# Altium PCB DSpico_PCB.PcbDoc (part 1 of 2)
Units mm, origin at the board's own origin, x right, y up, seen from the top; angles counter-clockwise.
Board outline 27.22 x 30.1 mm, 4 copper layers (L1, L2-GND, L3-PW, L4), stack 0.77 mm thick; 52 components, 45 nets, 173 pads, 142 vias.
Unrouted connection lines stored in the file: 1.
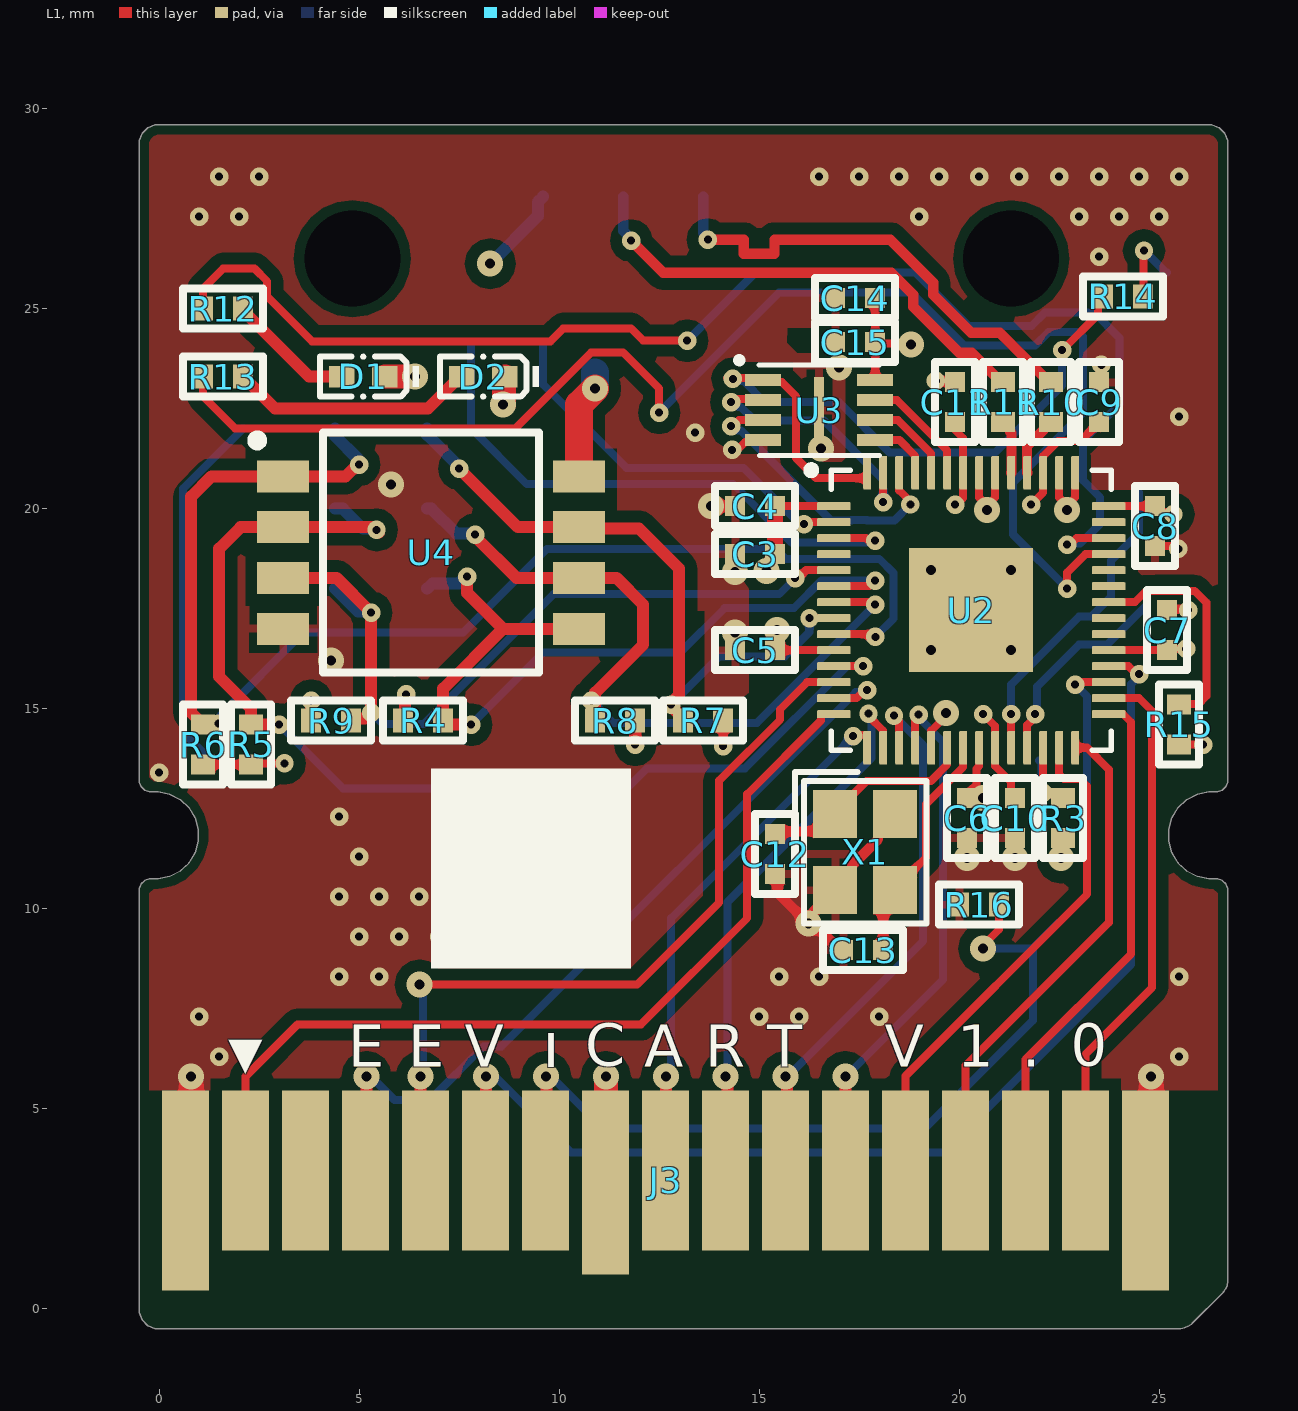
[diagram p0: L1 view]
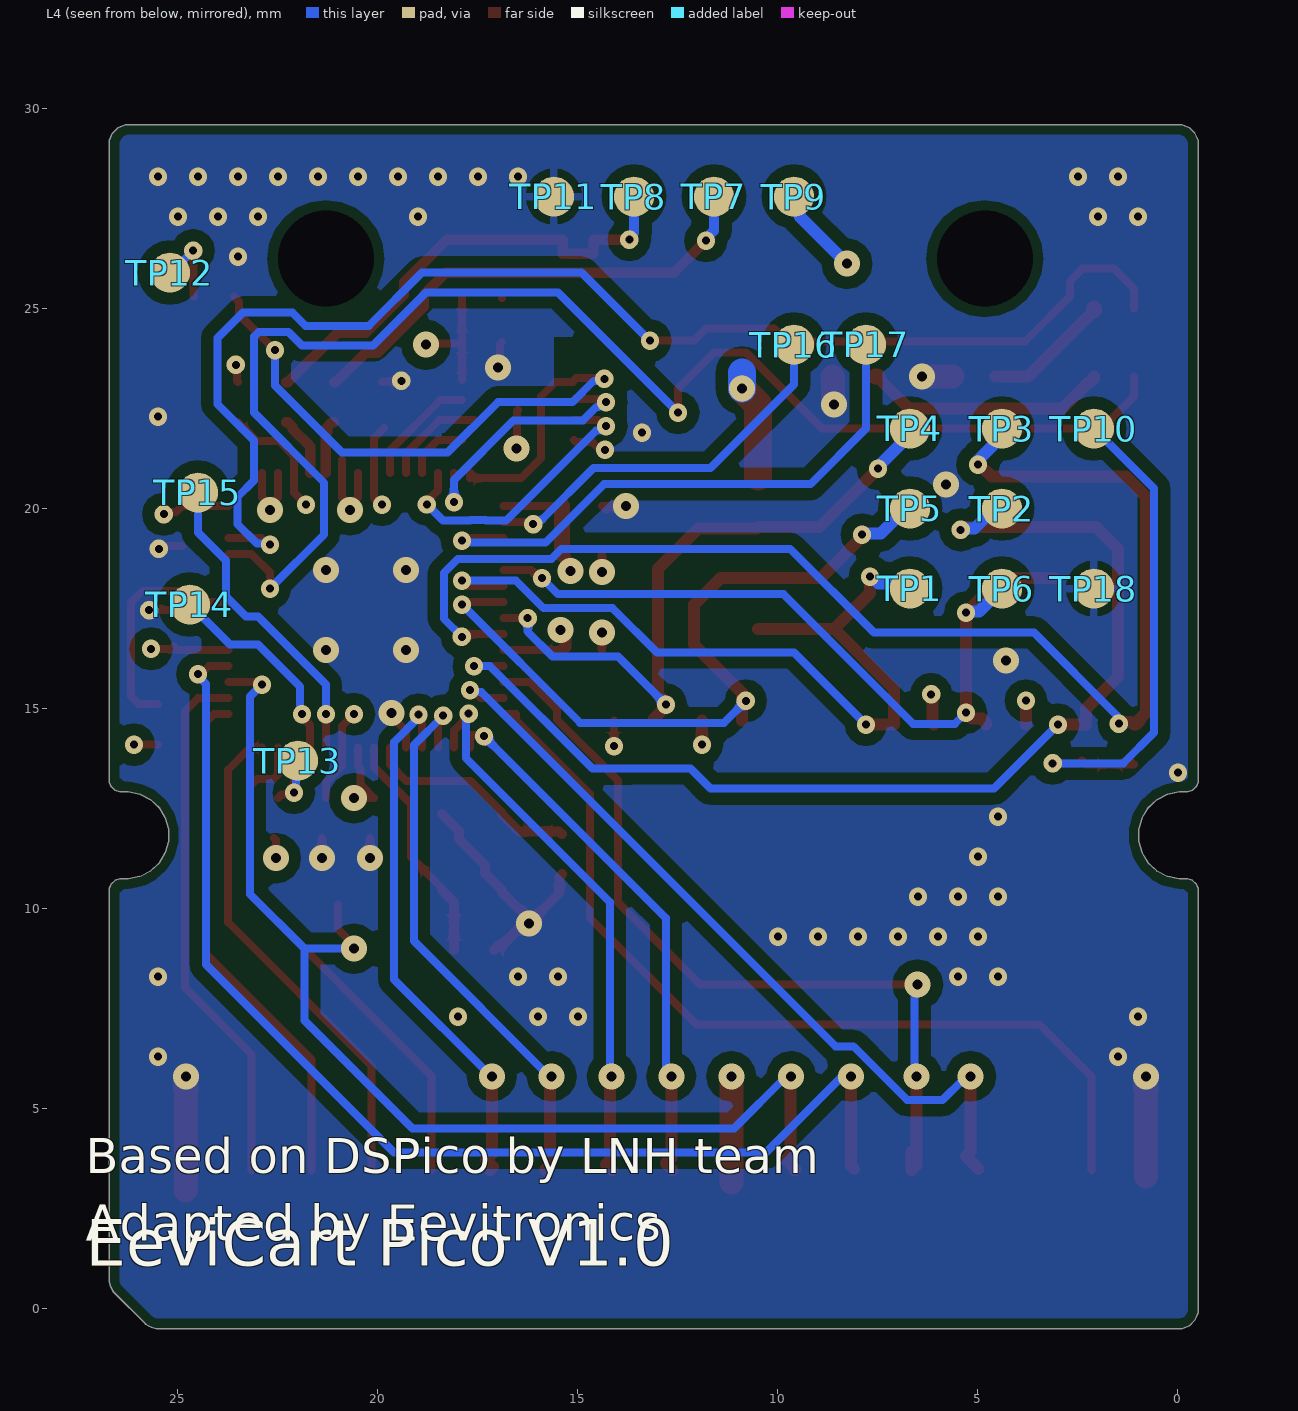
[diagram p1: L4 view, seen from below]
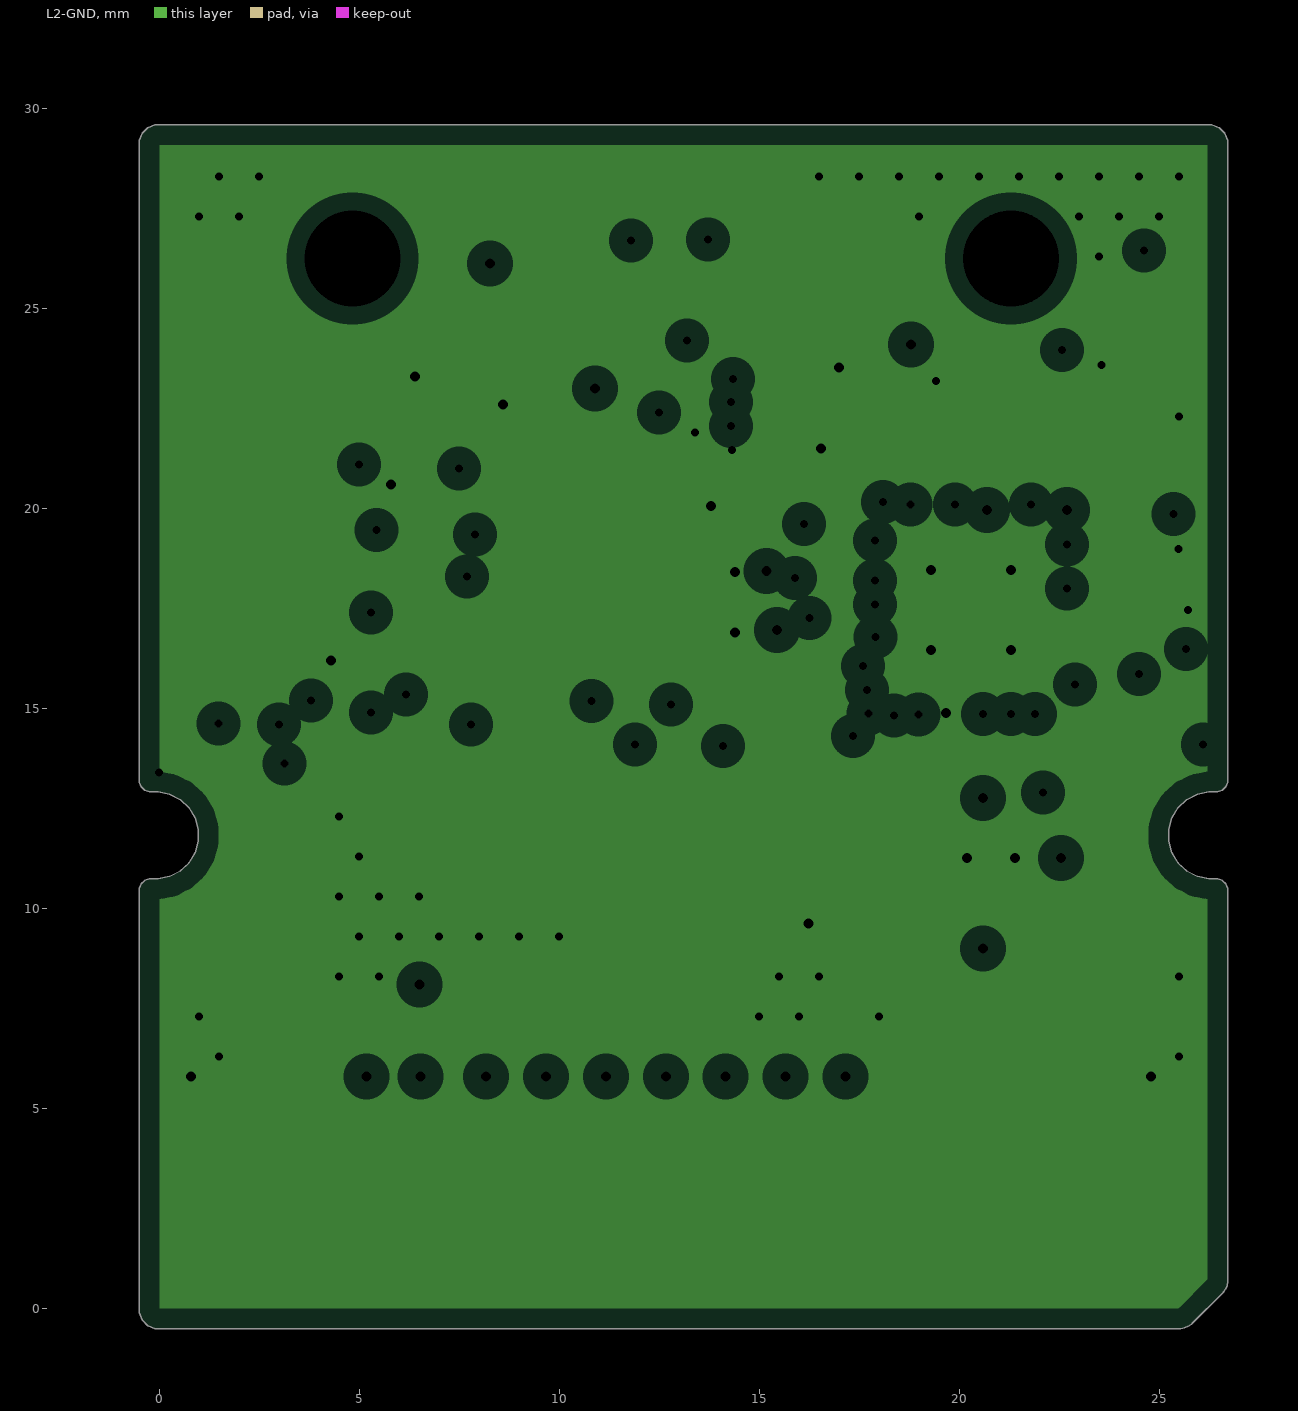
[diagram p2: L2-GND, clearances drawn from the general rule]
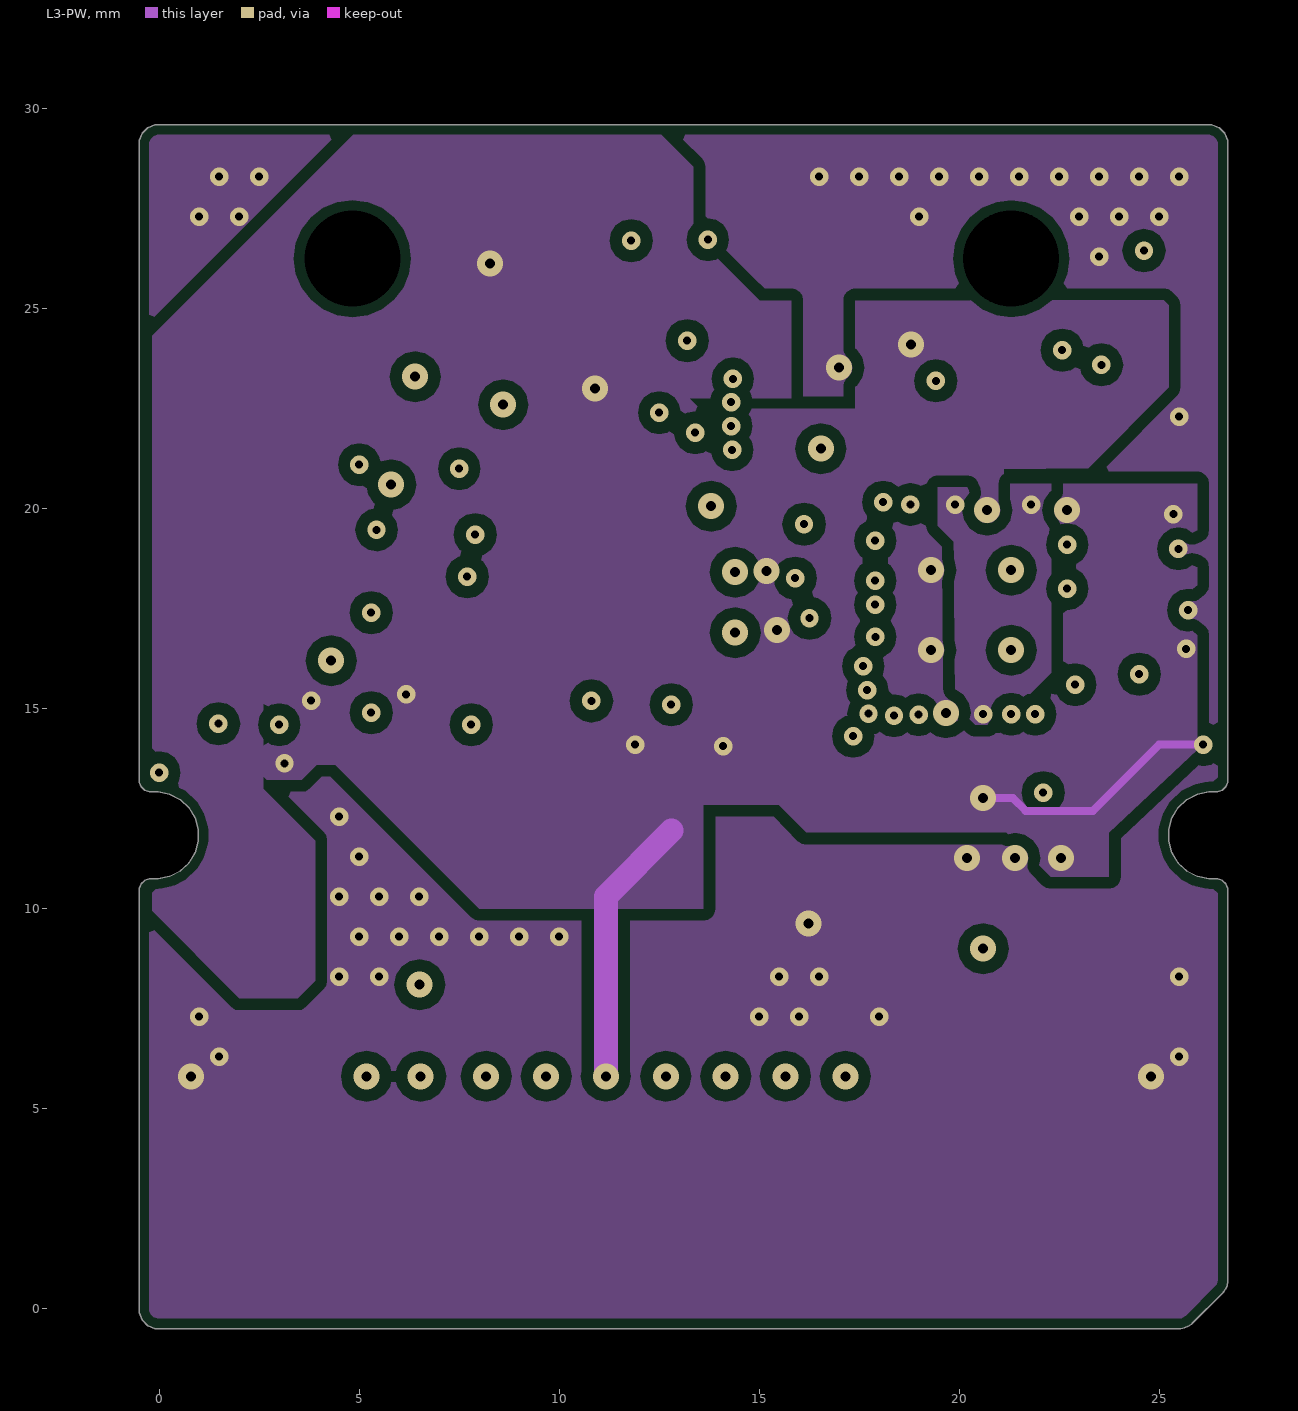
[diagram p3: L3-PW]
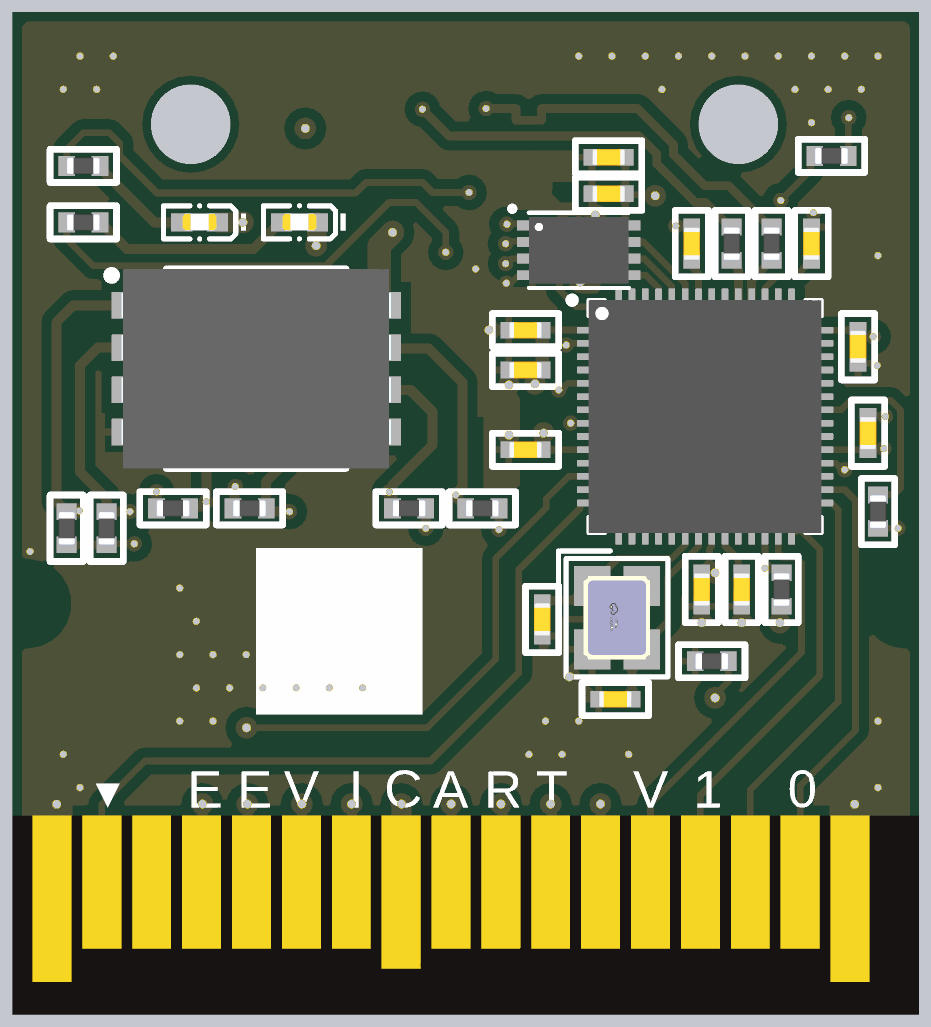
[diagram p4: 3D render of the assembled board from above, using the file's embedded part models]

## Layer stack, top to bottom
Top Solder: solder mask 0.01, Solder Resist, Dk 3.5
L1: signal copper 0.035
Dielectric 1: prepreg 0.21, PP-006, Dk 4.1
L2-GND: plane copper 0.015, net GND
Dielectric1: dielectric 0.25, FR-4, Dk 4.8
L3-PW: signal copper 0.015
Dielectric 2: prepreg 0.21, PP-006, Dk 4.1
L4: signal copper 0.035
Bottom Solder: solder mask 0.01, Solder Resist, Dk 3.5

## Board outline
-0.502,-0.101 -0.502,10.507 -0.452,10.621 -0.361,10.706 -0.243,10.748 -0.181,10.743 -0.032,10.743 0.26,10.803 0.525,10.94 0.743,11.143 0.898,11.398 0.978,11.684 0.978,11.982 0.898,12.269 0.743,12.523 0.525,12.727 0.26,12.863 -0.032,12.923 -0.181,12.923 -0.243,12.919 -0.361,12.96 -0.452,13.045 -0.502,13.16 -0.502,13.222 -0.502,29.199 -0.426,29.383 -0.285,29.524 -0.101,29.6 26.314,29.6 26.498,29.524 26.638,29.383 26.715,29.199 26.715,13.16 26.665,13.045 26.573,12.96 26.456,12.919 26.393,12.923 26.244,12.923 25.952,12.863 25.688,12.727 25.47,12.523 25.315,12.269 25.234,11.982 25.234,11.684 25.315,11.398 25.47,11.143 25.688,10.94 25.952,10.803 26.244,10.743 26.393,10.743 26.456,10.748 26.573,10.706 26.665,10.621 26.715,10.507 26.715,0.678 26.695,0.582 26.658,0.491 26.603,0.409 26.568,0.374 25.839,-0.355 25.804,-0.39 25.722,-0.445 25.631,-0.483 25.534,-0.502 25.485,-0.502 -0.002,-0.502 -0.101,-0.502 -0.285,-0.426 -0.426,-0.285

## Design rules (kind name [scope] priority, off if disabled: settings)
BoardOutlineClearance [All] p1: gap=0.25 ignorepadtopadclearanceinfootprint=FALSE except(0: Arc-SplitContinuation Track-SplitContinuation SMDPad-SplitContinuation THPad-SplitContinuation Via-SplitContinuation Fill-SplitContinuation Poly-SplitContinuation Region-SplitContinuation Text-SplitContinuation)
Clearance "Clearance poly Power Polygon" [OnLayer('L4-PWR') vs InPolygon] p1: gap=0.4 ignorepadtopadclearanceinfootprint=FALSE
Clearance Clearance-xPP-xTP-xTT [All] p2: gap=0.3 ignorepadtopadclearanceinfootprint=FALSE except(0.125: Arc-Arc Arc-Track Arc-SMDPad Arc-THPad Arc-Via Track-Track Track-SMDPad Track-THPad Track-Via SMDPad-SMDPad SMDPad-THPad SMDPad-Via THPad-THPad THPad-Via Via-Via; 0.15: Arc-Text Track-Text SMDPad-Text THPad-Text Via-Text Fill-Text Poly-Text Region-Text Text-Text; 0.25: Arc-Hole Track-Hole SMDPad-Hole THPad-Hole Via-Hole Fill-Hole Poly-Hole Region-Hole Text-Hole)
ComponentClearance [All] p1: gap=0 collisioncheckmode=3 verticalgap=0 showdistances=FALSE
DiffPairsRouting DiffPairsRouting_USB [All] p1: maxlimit=0.254 minlimit=0.1 mostfreqgap=0.127 toplayer_mingap=0.126 toplayer_minwidth=0.26 toplayer_maxwidth=0.861 toplayer_prefwidth=0.26 midlayer1_minwidth=0.143 midlayer1_maxwidth=0.499 midlayer1_prefwidth=0.143 bottomlayer_mingap=0.126 bottomlayer_minwidth=0.26 bottomlayer_maxwidth=0.861 bottomlayer_prefwidth=0.26 impedanceprofiledriven=TRUE impedanceprofileid={773E90AA-7B5E-4F0F-963B-D0F3BC933954} impedanceprofilevalue=90.000000 maxuncoupledlength=12.7
Height [All] p1: minheight=0 maxheight=25 prefheight=12.5
HoleSize HoleSize-PTH [All] p1: absolutevalues=TRUE maxlimit=4 minlimit=0.15 maxpercent=80.000 minpercent=20.000
HoleToHoleClearance [All] p1: gap=0.35 allowstackedmicrovias=TRUE
MatchedLengths MatchedLengths_USB_DiffPairs_1 [InxSignalClass('USB_CHJ1_1_DL') OR InxSignalClass('USB_CHJ1_1_RX') OR InxSignalClass('USB_CHJ1_1_TX')] p1: tolerance=0.127 checknetsindiffpair=TRUE checkdiffpairvsdiffpair=FALSE checkxsignals=FALSE checkothers=FALSE
MatchedLengths MatchedLengths_USB_DiffPairs [InxSignalClass('USB_CHJ1_1_DL') OR InxSignalClass('USB_CHJ1_1_RX') OR InxSignalClass('USB_CHJ1_1_TX')] p2: tolerance=0.127 checknetsindiffpair=TRUE checkdiffpairvsdiffpair=FALSE checkxsignals=FALSE checkothers=FALSE
MatchedLengths DiffPairClass [InDifferentialPairClass('All Differential Pairs')] p3: tolerance=0.127 checknetsindiffpair=TRUE checkdiffpairvsdiffpair=FALSE checkxsignals=FALSE checkothers=FALSE
MatchedLengths MatchedLengths_GBE0 [InNetClass('GBE0')] p4: tolerance=0.127 checknetsindiffpair=FALSE checkdiffpairvsdiffpair=TRUE checkxsignals=TRUE checkothers=TRUE
MatchedLengths MatchedLengths_GBE1 [InNetClass('GBE1')] p5: tolerance=0.127 checknetsindiffpair=FALSE checkdiffpairvsdiffpair=TRUE checkxsignals=TRUE checkothers=TRUE
MatchedLengths MatchedLengths_GBE2 [InNetClass('GBE2')] p6: tolerance=0.127 checknetsindiffpair=FALSE checkdiffpairvsdiffpair=TRUE checkxsignals=TRUE checkothers=TRUE
MatchedLengths MatchedLengths_HDMI [InNetClass('HDMI')] p7: tolerance=0.127 checknetsindiffpair=FALSE checkdiffpairvsdiffpair=TRUE checkxsignals=TRUE checkothers=TRUE
MatchedLengths MatchedLengths_USB-GBE [InNetClass('USB-GBE')] p8: tolerance=0.127 checknetsindiffpair=FALSE checkdiffpairvsdiffpair=TRUE checkxsignals=TRUE checkothers=TRUE
MatchedLengths MatchedLengths_USB3 [InNetClass('USB3')] p9: tolerance=0.127 checknetsindiffpair=FALSE checkdiffpairvsdiffpair=TRUE checkxsignals=TRUE checkothers=TRUE
MatchedLengths MatchedLengths_USB2 [InNetClass('USB2')] p10: tolerance=0.127 checknetsindiffpair=FALSE checkdiffpairvsdiffpair=TRUE checkxsignals=TRUE checkothers=TRUE
MatchedLengths MatchedLengths_DS [InNetClass('D[7..0]')] p11: tolerance=0.127 checknetsindiffpair=FALSE checkdiffpairvsdiffpair=TRUE checkxsignals=TRUE checkothers=TRUE
MinimumAnnularRing "Minimum IAR  >0.45mm" [((ObjectKind = 'Pad') OR (ObjectKind = 'Via')) And (Layer = 'MultiLayer') And (HoleDiameter > AsMM(0.45))] p1: minimumring=0.13 // minimum inner annular ring for pads > 0.45mm finished hole size
MinimumAnnularRing "Minimum IAR <=0.45mm" [((ObjectKind = 'Pad') OR (ObjectKind = 'Via')) And (Layer = 'MultiLayer') And (HoleDiameter <= AsMM(0.45))] p2: minimumring=0.13 // minimum inner annular ring for pads <= 0.45mm finished hole size
MinimumSolderMaskSliver [All] p1: minsoldermaskwidth=0.08
PlaneClearance PlaneClearance-IPI [All] p1: clearance=0.45
PlaneConnect PlaneConnect_PWR [HasFootprint('NDS_CARD')] p1: planeconnectstyle=Direct reliefexpansion=0.175 reliefentries=2 reliefconductorwidth=0.2 reliefairgap=0.2
PlaneConnect PlaneConnect_NDS [HasFootprint('NDS_CARD')] p2: planeconnectstyle=Direct reliefexpansion=0.175 reliefentries=2 reliefconductorwidth=0.2 reliefairgap=0.2
PlaneConnect PlaneConnect_VIA [IsVia] p3: planeconnectstyle=Direct reliefexpansion=0.175 reliefentries=4 reliefconductorwidth=0.2 reliefairgap=0.2
PlaneConnect [All] p4: planeconnectstyle=Relief reliefexpansion=0.2 reliefentries=4 reliefconductorwidth=0.25 reliefairgap=0.2
PolygonConnect PolygonConnect_VIA [HasFootprint('NET_TIE')] p1: connectstyle=Direct reliefconductorwidth=0.2 reliefentries=4 polygonreliefangle="90 Angle" airgapwidth=0.2
PolygonConnect PolygonConnect_NDS [HasFootprint('NDS_CARD')] p2: connectstyle=Direct reliefconductorwidth=0.2 reliefentries=4 polygonreliefangle="90 Angle" airgapwidth=0.2
PolygonConnect PolygonConnect_VIA_1 [All] p3: thpad.connectstyle=Relief thpad.reliefconductorwidth=0.2 thpad.reliefentries=4 thpad.polygonreliefangle="90 Angle" thpad.airgapwidth=0.2 smdpad.connectstyle=Relief smdpad.reliefconductorwidth=0.2 smdpad.reliefentries=4 smdpad.polygonreliefangle="90 Angle" smdpad.airgapwidth=0.2 via.connectstyle=Direct via.reliefconductorwidth=0.2 via.reliefentries=4 via.polygonreliefangle="90 Angle" via.airgapwidth=0.2
PolygonConnect PolygonConnect_SMD [Not HasFootprint('NET_TIE') and InNet('AGND')] p4: thpad.connectstyle=Direct thpad.reliefconductorwidth=0.2 thpad.reliefentries=4 thpad.polygonreliefangle="90 Angle" thpad.airgapwidth=0.2 smdpad.connectstyle=Relief smdpad.reliefconductorwidth=0.2 smdpad.reliefentries=4 smdpad.polygonreliefangle="90 Angle" smdpad.airgapwidth=0.2 via.connectstyle=Direct via.reliefconductorwidth=0.2 via.reliefentries=4 via.polygonreliefangle="90 Angle" via.airgapwidth=0.2
PolygonConnect [All] p5: connectstyle=Relief reliefconductorwidth=0.25 reliefentries=4 polygonreliefangle="90 Angle" airgapwidth=0.2
RoutingCorners [All] p1: cornerstyle=45-Degree minsetback=2.5 maxsetback=2.5
RoutingVias "RoutingVias > 0.45mm" [(ObjectKind = 'Via') And (HoleDiameter > AsMM(0.45))] p1: holewidth=0.5 width=0.85 viastyle="Through Hole" minholewidth=0.5 minwidth=0.85 maxholewidth=0.9 maxwidth=1.25 // finishet hole size > 0.45mm
RoutingVias "RoutingVias <= 0.45mm" [(ObjectKind = 'Via') And (HoleDiameter <= AsMM(0.45))] p2: holewidth=0.2 width=0.55 viastyle="Through Hole" minholewidth=0.15 minwidth=0.5 maxholewidth=0.45 maxwidth=0.8 // finishet hole size <= 0.45mm
SilkToSilkClearance [All] p1: silktosilkclearance=0.1
SilkToSolderMaskClearance SilkscreenOverComponentPads [IsPad] p1: minsilkscreentomaskgap=0.1 clearancetoexposedcopper=TRUE
SolderMaskExpansion [All] p1: expansion=0 istentingtop=FALSE
SupplyNets "Schematic Supply Nets_4" [InNet('+1V1')] p1: voltage=0.000
SupplyNets "Schematic Supply Nets_3" [InNet('+VBUS')] p2: voltage=0.000
SupplyNets "Schematic Supply Nets_2" [InNet('GND')] p3: voltage=0.000
SupplyNets "Schematic Supply Nets_1" [InNet('+3V3')] p4: voltage=0.000
UnRoutedNet [All] p1: checkbadconnections=TRUE
Width Width-xTW [All] p1: maxlimit=5 minlimit=0.125 preferedwidth=0.15
Width Width-GigaE [All] p2: maxlimit=0.15 minlimit=0.15 preferedwidth=0.15
Width Width-Power [InNetClass('PWR')] p3: maxlimit=5 minlimit=0.2 preferedwidth=0.25
18 further rules are at their usual default settings.

## Classes and differential pairs
net class D[7..0]: D0 D1 D2 D3 D4 D5 D6 D7
differential pair D: +D_P -D_N
differential pair USB_D: +USB_D_P -USB_D_N

## Components (designator, comment, footprint, x,y, rotation, side; value= is the part's Value field where it differs from the comment)
C3 "1uF" C0402 14.9,18.86 r0 top
C4 "100NF" C0402 14.9,20.06 r0 top
C5 "100NF" C0402 14.9,16.46 r0 top
C6 "100NF" C0402 20.2,12.26 r90 top
C7 "100NF" C0402 25.2,16.96 r270 top
C8 "100NF" C0402 24.9,19.56 r90 top
C9 "1uF" C0402 23.5,22.66 r270 top
C10 "100NF" C0402 21.4,12.26 r90 top
C11 "100NF" C0402 19.9,22.66 r270 top
C12 "12PF" C0402 15.4,11.36 r90 top
C13 "12PF" C0402 17.6,8.96 r0 top
C14 "2.2uF" C0402 17.4,25.26 r0 top
C15 "100NF" C0402 17.4,24.16 r0 top
D1 "BL-HB337A-AV-TRB" LED0402-RD 5.1,23.3 r180 top
D2 "BL-HUB37A-AV-TRB" LED0402-RD 8.1,23.3 r180 top
J3 "NDS_CARDA" NDS_CARD 0.659,2.959 r0 top
R3 "10K" R0402 22.6,12.26 r270 top
R4 "10K" R0402 6.6,14.7 r180 top
R5 "10K" R0402 2.3,14.1 r270 top
R6 "10K" R0402 1.1,14.1 r270 top
R7 "10K" R0402 13.6,14.7 r0 top
R8 "10K" R0402 11.4,14.7 r0 top
R9 "10K" R0402 4.3,14.7 r180 top
R10 "RC0402FR-0727RL" R0402 22.3,22.66 r270 top value=27
R11 "RC0402FR-0727RL" R0402 21.1,22.66 r270 top value=27
R12 "120R" R0402 1.6,25 r180 top
R13 "220R" R0402 1.6,23.3 r180 top
R14 "1K" R0402 24.1,25.3 r180 top
R15 "1K" R0402 25.5,14.6 r90 top
R16 "10K" R0402 20.5,10.1 r0 top value=220R
TP1 "SD_CMD" "Test Point"#1 6.7,18 r90 bottom locked
TP2 "SD_DAT3" "Test Point"#1 4.4,20 r90 bottom locked
TP3 "SD_DAT2" "Test Point"#1 4.4,22 r90 bottom locked
TP4 "SD_DAT1" "Test Point"#1 6.7,22 r90 bottom locked
TP5 "SD_DAT0" "Test Point"#1 6.7,20 r90 bottom locked
TP6 "SD_CLK" "Test Point"#1 4.4,18 r90 bottom locked
TP7 "USB_DP" "Test Point"#1 11.6,27.8 r90 bottom locked
TP8 "USB_DN" "Test Point"#1 13.6,27.8 r90 bottom locked
TP9 "+3V3" "Test Point"#1 9.6,27.8 r90 bottom locked
TP10 "+3V3" "Test Point"#2 2.2,22 r90 bottom locked
TP11 "GND" "Test Point"#1 15.6,27.8 r90 bottom locked
TP12 "BOOT_SEL" "Test Point"#1 25.2,25.9 r90 bottom locked
TP13 "RUN" "Test Point"#1 22,13.7 r90 bottom locked
TP14 "" "Test Point"#1 24.7,17.6 r90 bottom locked
TP15 "" "Test Point"#1 24.5,20.4 r90 bottom locked
TP16 "" "Test Point"#1 9.6,24.1 r90 bottom locked
TP17 "" "Test Point"#1 7.8,24.1 r90 bottom locked
TP18 "" "Test Point"#2 2.2,18 r90 bottom locked
U2 "RP2040" QFN40P700X700X90-57N 20.3,17.46 r0 top locked
U3 "W25Q16JVUXIQ" SON50P300X200X60-9N 16.5,22.46 r0 top
U4 "MKDV1GCL-AB" SON127P800X600X80-8N 6.8,18.9 r0 top
X1 "XYDBPCNANF-12MHZ" OSC-SMD_4P-L2.5-W2.0-BL 17.65,11.41 r270 top

## Footprints (in the part's own frame and the unit in brackets; to place one, negate y for a bottom-side part, rotate by r counter-clockwise, add the part's x,y. Pads: shape width x height; smd on the part's side, far side on the other; paste and mask are expansions set on the pad)
C0402 [mm]
  rect 0.5x0.5 smd: 1(-0.5,0) 2(0.5,0)
  silkscreen extent -1,-0.5 1,0.5, body extent -0.5,-0.25 0.5,0.25, height 0.56
LED0402-RD [mm]
  rect 0.636x0.54 smd: 1(-0.538,0) 2(0.538,0)
  silkscreen extent -1.39,-0.54 1.09,0.54, body extent -0.51,-0.26 0.51,0.25, height 0.19
NDS_CARD [mm] "NDS_CARD"
  rect 1.17x5 smd paste-1: 1(0,0) 17(24,0)
  rect 1.17x4 smd paste-1: 2(1.5,0.5) 3(3,0.5) 4(4.5,0.5) 5(6,0.5) 6(7.5,0.5) 7(9,0.5) 9(12,0.5) 10(13.5,0.5) 11(15,0.5) 12(16.5,0.5) 13(18,0.5) 14(19.5,0.5) 15(21,0.5) 16(22.5,0.5)
  rect 1.17x4.6 smd paste-1: 8(10.5,0.2)
  L1 pour cut-out: -1.575,2.5 26.65,2.5 26.65,-3.975 -1.575,-3.975
OSC-SMD_4P-L2.5-W2.0-BL [mm]
  rect 1.2x1.1 smd: 1(-0.95,-0.75) 2(0.95,-0.75) 3(0.95,0.75) 4(-0.95,0.75)
  silkscreen extent -2.01,-1.76 1.78,1.53, body extent -1.25,-1 1.25,1, height 0.55
QFN40P700X700X90-57N [mm]
  rrect25% 0.84x0.2 smd: 1(-3.435,2.6) 2(-3.435,2.2) 3(-3.435,1.8) 4(-3.435,1.4) 5(-3.435,1) 6(-3.435,0.6) 7(-3.435,0.2) 8(-3.435,-0.2) 9(-3.435,-0.6) 10(-3.435,-1) 11(-3.435,-1.4) 12(-3.435,-1.8) 13(-3.435,-2.2) 14(-3.435,-2.6) 29(3.435,-2.6) 30(3.435,-2.2) 31(3.435,-1.8) 32(3.435,-1.4) 33(3.435,-1) 34(3.435,-0.6) 35(3.435,-0.2) 36(3.435,0.2) 37(3.435,0.6) 38(3.435,1) 39(3.435,1.4) 40(3.435,1.8) 41(3.435,2.2) 42(3.435,2.6)
  rrect25% 0.2x0.84 smd: 15(-2.6,-3.435) 16(-2.2,-3.435) 17(-1.8,-3.435) 18(-1.4,-3.435) 19(-1,-3.435) 20(-0.6,-3.435) 21(-0.2,-3.435) 22(0.2,-3.435) 23(0.6,-3.435) 24(1,-3.435) 25(1.4,-3.435) 26(1.8,-3.435) 27(2.2,-3.435) 28(2.6,-3.435) 43(2.6,3.435) 44(2.2,3.435) 45(1.8,3.435) 46(1.4,3.435) 47(1,3.435) 48(0.6,3.435) 49(0.2,3.435) 50(-0.2,3.435) 51(-0.6,3.435) 52(-1,3.435) 53(-1.4,3.435) 54(-1.8,3.435) 55(-2.2,3.435) 56(-2.6,3.435)
  rect 3.1x3.1 smd paste-0.57: 57(0,0)
  silkscreen extent -4.1,-3.5 3.5,3.6, body extent -3.5,-3.5 3.5,3.5, height 0.9
R0402 [mm]
  rect 0.5x0.6 smd: 1(-0.5,0) 2(0.5,0)
  silkscreen extent -1,-0.5 1,0.5, body extent -0.5,-0.25 0.5,0.25, height 0.4
SON50P300X200X60-9N [mm]
  rect 0.9x0.3 smd: 1(-1.4,0.75) 2(-1.4,0.25) 3(-1.4,-0.25) 4(-1.4,-0.75) 5(1.4,-0.75) 6(1.4,-0.25) 7(1.4,0.25) 8(1.4,0.75)
  rect 0.25x1.65 smd: 9(0,0)
  silkscreen extent -2.08,-1.13 1.51,1.33, body extent -1.5,-1 1.5,1, height 0.6
SON127P800X600X80-8N [mm]
  rect 1.3x0.8 smd: 1(-3.7,1.905) 2(-3.7,0.635) 3(-3.7,-0.635) 4(-3.7,-1.905) 5(3.7,-1.905) 6(3.7,-0.635) 7(3.7,0.635) 8(3.7,1.905)
  silkscreen extent -4.47,-3 2.7,3, body extent -4.05,-3 4.05,3, height 0.8
"Test Point"#1 [mm]
  round 1 smd paste-2539.97: 1(0,0)
"Test Point"#2 [mm]
  round 1 smd paste-2539.97: 1(0,-0.1)

## Part data
C3 C9: library part C1005X5R1E105K050BC, "TDK - C1005X5R1E105K050BC - COND, CERÁ MULT, X5R, 1UF, 25V, 0402", Case Code (Imperial)=0402, Case Code (Metric)=1005, Dielectric=X5R, Dielectric Material=Ceramic, Manufacturer=TDK, Max Operating Temperature=85°C, Min Operating Temperature=-55°C, Package Quantity=1, Supplier Part Number 1=2346884, Tolerance=10%, Voltage Rating=25V, Capacitance=1uF, Case/Package=0402, ComponentLink1Description=http://www.farnell.com/datasheets/1796654.pdf, ComponentLink1URL=http://www.farnell.com/datasheets/1796654.pdf, Composition=Ceramic, Depth=0.5mm, Height=0.5mm, Lead Free="Lead Free", Length=1mm, Manufacturer Part Number=C1005X5R1E105K050BC, Mount="Surface Mount", Packaging="Tape and Reel", Pricing="10=0,0948, 100=0,0638, 500=0,0468, 2500=0,0336, 5000=0,028, 10000=0,021, 50000=0,0175, 100000=0,0153 (EUR)", Radiation Hardening=No, REACH SVHC="No SVHC", RoHS=YES, Stock=131328, Storage Location=C1-F2, Supplier 1=Farnell, Supplier 2=RSComponents, Supplier 3=Mouser, Supplier 4=Digi-Key, Supplier Part Number 2=1110310, Supplier Part Number 3=810-C1005X5R1E105K, Supplier Part Number 4=445-9066-1-ND, Termination=SMD/SMT, Thickness=0.022inch, Voltage Rating (DC)=25V, Weight=2.3E-05oz, Width=0.02inch
C4 C5 C6 C7 C8 C10 C11 C15: library part GRM155R71C104KA88D, "0402 0.1 uF 16V ±10 % Tolerance X7R SMT Multilayer Ceramic Capacitor", Capacitance=100nF, Case Code (Imperial)=0402, Case Code (Metric)=1005, Dielectric=X7R, Dielectric Material=Ceramic, Insulation Resistance=10GR, Manufacturer=Murata, Max Operating Temperature=125°C, Min Operating Temperature=-55°C, Package Quantity=1, Supplier Part Number 1=490-3261-1-ND, Tolerance=10%, Voltage=16V, Case/Package=0402, Category="Ceramic Capacitors", ComponentLink1Description=https://datasheet.ciiva.com/129/grm155r71c104ka88-01-129739.pdf?src-supplier=Digi-Key, ComponentLink1URL=https://datasheet.ciiva.com/129/grm155r71c104ka88-01-129739.pdf?src-supplier=Digi-Key, ComponentLink2Description=https://datasheet.ciiva.com/129/grm155r71c104ka88-01-129740.pdf?src-supplier=Digi-Key, ComponentLink2URL=https://datasheet.ciiva.com/129/grm155r71c104ka88-01-129740.pdf?src-supplier=Digi-Key, ComponentLink3Description=https://datasheet.ciiva.com/18102/getdatasheetpartid-85307-18102905.pdf?src-supplier=Verical, ComponentLink3URL=https://datasheet.ciiva.com/18102/getdatasheetpartid-85307-18102905.pdf?src-supplier=Verical, ComponentLink4Description=https://datasheet.ciiva.com/29199/454098-da-01-en-vs-kondensator-0402-29199799.pdf?src-supplier=Conrad, ComponentLink4URL=https://datasheet.ciiva.com/29199/454098-da-01-en-vs-kondensator-0402-29199799.pdf?src-supplier=Conrad, ComponentLink5Description=https://datasheet.ciiva.com/7937/4360-7937615.pdf?src-supplier=Element14, ComponentLink5URL=https://datasheet.ciiva.com/7937/4360-7937615.pdf?src-supplier=Element14, ComponentLink6Description=https://datasheet.ciiva.com/14116/grmseries-highdielectrictype-eng-14116878.pdf?src-supplier=Distrelec, ComponentLink6URL=https://datasheet.ciiva.com/14116/grmseries-highdielectrictype-eng-14116878.pdf?src-supplier=Distrelec, ComponentLink7Description=https://datasheet.ciiva.com/14103/grmseries-highdielectrictype-eng-14103750.pdf?src-supplier=Distrelec, ComponentLink7URL=https://datasheet.ciiva.com/14103/grmseries-highdielectrictype-eng-14103750.pdf?src-supplier=Distrelec, ComponentLink8Description=https://datasheet.ciiva.com/28534/4360-28534127.pdf?src-supplier=Element14, ComponentLink8URL=https://datasheet.ciiva.com/28534/4360-28534127.pdf?src-supplier=Element14, ComponentLink9Description=https://datasheet.ciiva.com/28534/4360-28534133.pdf?src-supplier=Element14, ComponentLink9URL=https://datasheet.ciiva.com/28534/4360-28534133.pdf?src-supplier=Element14, ComponentLink10Description=https://datasheet.ciiva.com/16199/product-16199000.pdf?src-supplier=Future+Electronics, ComponentLink10URL=https://datasheet.ciiva.com/16199/product-16199000.pdf?src-supplier=Future+Electronics, Depth=0.5mm, Height=0.5mm, Lead Free="Lead Free", Length=1mm, Manufacturer Part Number=GRM155R71C104KA88D, Material=Ceramic, Mount="Surface Mount", Number of Pins=2, Packaging="Tape and Reel", Pricing 1="1=0,10000, 10=0,02200, 50=0,01180, 100=0,00960, 500=0,00688, 1000=0,00541, 2500=0,00492, 5000=0,00452 (USD)", Radiation Hardening=No, REACH SVHC="No SVHC", RoHS=Yes, RoHS Compliant=Yes, Stock 1=30795639, Supplier 1=Digi-Key, Termination=SMD/SMT, Thickness=0.022inch, Voltage Rating=16V, Voltage Rating (DC)=16V, Width=0.5mm
C12 C13: library part 04025A120JAT2A, "CAP CER 12PF 50V C0G/NP0 0402", Capacitance=12pF, Case Code (Imperial)=0402, Case Code (Metric)=1005, Dielectric=C0G, Insulation Resistance=100GR, Manufacturer="Kyocera AVX", Max Operating Temperature=125°C, Min Operating Temperature=-55°C, Package Quantity=1, Supplier Part Number 1=96M1132, Temperature Coefficient=30ppm/°C, Tolerance=5%, Voltage=50V, Case/Package=0402, Category="Ceramic Capacitors", Construction=Flat, Depth=0.5mm, Height=0.5mm, Lead Free="Lead Free", Length=1mm, Manufacturer Part Number=04025A120JAT2A, Mount="Surface Mount,PCB", Number of Pins=2, Packaging="Tape and Reel", Radiation Hardening=No, Reach SVHC Compliant=Yes, RoHS=Yes, RoHS Compliant=Yes, Series=-, Supplier 1=Newark, Termination=SMD/SMT, Thickness=0.022inch, Voltage Rating=50V, Voltage Rating (DC)=50V, Width=0.02inch
C14: library part C1005X5R1A225K050BC, "TDK - C1005X5R1A225K050BC - COND, CERÁ MULT, X5R, 2.2UF, 10V, 0402", Manufacturer=TDK, Supplier Part Number 1=2346879, .PCBCheck=VMM, .SCHCheck=VMM, ComponentLink1Description=http://bcove.me/dwwzmldz, ComponentLink1URL=http://bcove.me/dwwzmldz, ComponentLink2Description=http://www.farnell.com/datasheets/1913358.pdf, ComponentLink2URL=http://www.farnell.com/datasheets/1913358.pdf, Manufacturer Part Number=C1005X5R1A225K050BC, Pricing 1="5=0.142, 300=0.0926, 1000=0.0836, 2500=0.0667, 5000=0.0564 (EUR)", RoHS=YES, Stock 1=13179, Supplier 1=Farnell, Supplier 2=Mouser, Supplier 3=Digi-Key, Supplier Part Number 2=810-C1005X5R1A225K, Supplier Part Number 3=445-7392-1-ND
D1: "Blue 0402 1X.5X4MM", Case Code (Imperial)=0402, Case Code (Metric)=1005, Color=Blue, Forward Voltage=2.8V, Lens Color=Colorless, Manufacturer="American Bright", Test Current=20mA, Case/Package=0402, Category=LEDs, ComponentLink1Description=http://www.americanbrightled.com/pdffiles/smt/BL-HGE37A-AV-TRB.pdf?src-supplier=Digi-Key, ComponentLink1URL=http://www.americanbrightled.com/pdffiles/smt/BL-HGE37A-AV-TRB.pdf?src-supplier=Digi-Key, Dominant Wavelength=571nm, Height=0.45mm, Length=1mm, Lens Size=0.5mm, Lens Style=Flat, Lens Transparency=Clear, Luminous Intensity=35mcd, Manufacturer Part Number=BL-HB337A-AV-TRB, Mount="Surface Mount", Packaging="Cut Tape", Pricing 1="1=0,35000, 10=0,27300, 100=0,12260, 500=0,11074, 1000=0,09097 (USD)", RoHS=Yes, RoHS Compliant=Yes, Stock 1=2065, Viewing Angle=120°, Width=0.5mm
D2: "Red 0402 1X.5X4MM", Case Code (Imperial)=0402, Case Code (Metric)=1005, Color=Red, Forward Voltage=2V, Lens Color=Colorless, Manufacturer="American Bright", Test Current=20mA, Case/Package=0402, Category=LEDs, ComponentLink1Description=http://www.americanbrightled.com/pdffiles/smt/BL-HGE37A-AV-TRB.pdf?src-supplier=Digi-Key, ComponentLink1URL=http://www.americanbrightled.com/pdffiles/smt/BL-HGE37A-AV-TRB.pdf?src-supplier=Digi-Key, Dominant Wavelength=571nm, Height=0.45mm, Length=1mm, Lens Size=0.5mm, Lens Style=Flat, Lens Transparency=Clear, Luminous Intensity=35mcd, Manufacturer Part Number=BL-HUB37A-AV-TRB, Mount="Surface Mount", Packaging="Cut Tape", Pricing 1="1=0,35000, 10=0,27300, 100=0,12260, 500=0,11074, 1000=0,09097 (USD)", RoHS=Yes, RoHS Compliant=Yes, Stock 1=2065, Viewing Angle=120°, Width=0.5mm
R3 R4 R5 R6 R7 R8 R9: library part CRCW040210K0FKED, "VISHAY DRALORIC - CRCW040210K0FKED - RESISTENCIA, 10K, 0.063W, 1%, 0402, SMD", Case Code (Imperial)=0402, Case Code (Metric)=1005, Manufacturer=Vishay, Max Operating Temperature=155°C, Max Power Dissipation=63mW, Min Operating Temperature=-55°C, Package Quantity=10, Resistance=10kR, Supplier Part Number 1=1469669, Temperature Coefficient=100ppm/°C, Tolerance=1%, Voltage Rating=50V, Case/Package=0402, ComponentLink1Description=http://www.farnell.com/datasheets/1720486.pdf, ComponentLink1URL=http://www.farnell.com/datasheets/1720486.pdf, ComponentLink2Description=http://www.farnell.com/cad/1551228.zip, ComponentLink2URL=http://www.farnell.com/cad/1551228.zip, Composition="Thick Film", Contact Plating=Tin, Depth=0.5mm, Features="Automotive AEC-Q200", Height=0.35mm, Lead Free="Lead Free", Length=1mm, Manufacturer Part Number=CRCW040210K0FKED, Military Standard=Not, Mount="Surface Mount", Number of Pins=2, Number of Terminations=2, Packaging="Tape and Reel", Power Rating=63mW, Pricing="10=0.0147, 100=0.0113, 500=0.0091, 2500=0.007, 5000=0.0055 (GBP)", Radiation Hardening=No, REACH SVHC=Unknown, RoHS=Y-EX, Stock=0, Storage Location=C1-F2, Supplier 1=Farnell, Supplier 2=RSComponents, Supplier 3=Mouser, Supplier 4=Digi-Key, Supplier Part Number 2=6784697, Supplier Part Number 3=71-CRCW0402-10K-E3, Supplier Part Number 4=541-10.0KLTR-ND, Termination=SMD/SMT, Voltage Rating (DC)=50V, Weight=2.3E-05oz, Width=0.02inch
R10 R11: "RES 27 OHM 1% 1/16W 0402", Case/Package=0402, Max Operating Temperature=155°C, Min Operating Temperature=-55°C, Package Height=0.35mm, Package Length=1mm, Package Shape=Rectangular, Package Style=SMTMeter, Package Width=0.5mm, Rated Power Dissipation (P)=62.5mW, Rated Temperature=70°C, Resistance=27R, Resistor Type="FIXED RESISTOR", Temperature Coefficient=100ppm/°C, Tolerance=1%, Working Voltage=50V, Additional Feature="LASER TRIMMABLE", Construction=Chip, JESD-609 Code=e3, Mount="Surface Mount", Number of Pins=2, Packaging="Tape and Reel", REACH SVHC=Yes, RoHS Compliant=Yes, Size Code=0402, Technology="METAL GLAZE/THICK FILM", Terminal Finish=Nickel, Termination=Wraparound
R12: library part RC0402FR-07120RL, "Res General Purpose Thick Film 0402 120 Ohm 1% 1/16W ±100ppm/°C Molded Paper T/R", Case Code (Imperial)=0402, Case Code (Metric)=1005, Manufacturer=Yageo, Max Operating Temperature=155°C, Max Power Dissipation=63mW, Min Operating Temperature=-55°C, Package Quantity=1, Power Rating=62.5mW, Resistance Tolerance=1%, Resistor Type="Thick Film", Supplier Part Number 1=9239120, Temperature Coefficient=100ppm/°C, Voltage Rating=50V, Case/Package=0402, Category="Chip SMD Resistors", ComponentLink1Description=https://datasheet.ciiva.com/12667/pyu-rc0402-51-rohs-l-6-r-12667958.pdf?src-supplier=Mouser, ComponentLink1URL=https://datasheet.ciiva.com/12667/pyu-rc0402-51-rohs-l-6-r-12667958.pdf?src-supplier=Mouser, ComponentLink2Description=https://datasheet.ciiva.com/7849/1018594-7849831.pdf?src-supplier=Element14, ComponentLink2URL=https://datasheet.ciiva.com/7849/1018594-7849831.pdf?src-supplier=Element14, Construction=Rectangular, Depth=0.5mm, Features="Moisture Resistant", Height=0.016inch, Lead Free=5697LeadFree, Length=0.039inch, Manufacturer Part Number=RC0402FR-07120RL, Military Standard=Not, Number of Terminations=2, Packaging="Tape and Reel", Pricing 1="10=0,0101, 100=0,0056, 500=0,0044, 2500=0,0032, 5000=0,0026, 10000=0,002, 50000=0,0019, 100000=0,0018 (EUR)", Reach SVHC Compliant=No, Resistance=120R, RoHS=Yes, RoHS Compliant=Yes, Series=RC, Size Code=0402, Stock 1=238785, Supplier 1=Farnell, Technology="THICK FILM", Termination=SMD/SMT, Tolerance=1%, Voltage Rating (AC)=50V, Width=0.02inch
R13: library part RC0402FR-07220RL, "SMD Chip Resistor, 220 Ohm, ± 1%, 62.5 mW, 0402 [1005 Metric], Thick Film, General Purpose", Case Code (Imperial)=0402, Case Code (Metric)=1005, Manufacturer=Yageo, Max Operating Temperature=155°C, Max Power Dissipation=63mW, Min Operating Temperature=-55°C, Package Quantity=1, Power Rating=62.5mW, Resistance Tolerance=1%, Resistor Type="Thick Film", Supplier Part Number 1=9239154, Temperature Coefficient=100ppm/°C, Voltage Rating=50V, Case/Package=0402, Category="Chip SMD Resistors", ComponentLink1Description=http://www.farnell.com/datasheets/2167052.pdf?src-supplier=Farnell, ComponentLink1URL=http://www.farnell.com/datasheets/2167052.pdf?src-supplier=Farnell, ComponentLink2Description=http://www.farnell.com/datasheets/1018594.pdf?src-supplier=Farnell, ComponentLink2URL=http://www.farnell.com/datasheets/1018594.pdf?src-supplier=Farnell, ComponentLink3Description=http://www.farnell.com/datasheets/1686128.pdf?src-supplier=Element14, ComponentLink3URL=http://www.farnell.com/datasheets/1686128.pdf?src-supplier=Element14, ComponentLink4Description=http://www.farnell.com/datasheets/2167052.pdf?src-supplier=Newark, ComponentLink4URL=http://www.farnell.com/datasheets/2167052.pdf?src-supplier=Newark, ComponentLink5Description=http://www.farnell.com/datasheets/2167052.pdf?src-supplier=Element14, ComponentLink5URL=http://www.farnell.com/datasheets/2167052.pdf?src-supplier=Element14, ComponentLink6Description=https://datasheet.octopart.com/RC0402FR-07220RL-Yageo-datasheet-10408619.pdf?src-supplier=Element14, ComponentLink6URL=https://datasheet.octopart.com/RC0402FR-07220RL-Yageo-datasheet-10408619.pdf?src-supplier=Element14, Construction=Rectangular, Depth=0.5mm, Features="Moisture Resistant", Height=0.016inch, Lead Free=5697LeadFree, Length=0.039inch, Manufacturer Part Number=RC0402FR-07220RL, Military Standard=Not, Number of Pins=2, Number of Terminations=2, Packaging="Tape and Reel", Pricing 1="10=0,0099, 100=0,0055, 500=0,0044, 2500=0,0032, 5000=0,0031 (EUR)", Reach SVHC Compliant=No, Resistance=220R, RoHS=Yes, RoHS Compliant=Yes, Series=RC, Size Code=0402, Stock 1=412549, Supplier 1=Farnell, Technology="THICK FILM", Termination=SMD/SMT, Tolerance=1%, Voltage Rating (AC)=50V, Voltage Rating (DC)=50V, Width=0.02inch
R14 R15: library part CRCW04021K00FKEDC, "VISHAY - CRCW04021K00FKED - RES, PELÍC GRUESA, 1K, 1%, 0.063W, 0402", Coeficiente de Temperatura="± 100", Manufacturer=VISHAY, Manufacturer Part Number=CRCW04021K00FKED, Rango de Temperatura de Funcionamiento="-55°C a +155", Resistencia=1, Resistencia, Montaje="Dispositivo de Montaje Superficial (SMD)", Supplier Part Number 1=1469662, Temperatura de Trabajo Máx.=155, Temperatura de Trabajo Mín.="-55°C<!--FANDB--><div class=\"features-and-benefits-container\"><div class=\"features-and-benefits-description\"><span class=\"features-benefits-value\">The Vishay D/CRCW e3 series are standard thick film chip resistors. The resistance range includes E96 and E24 decade values from 1ohm to 10Mohm. CRCW e3 series resistors have a pure tin solder contacts on the Ni barrier layer that provides compatibility with reflow soldering process.</span></div><div class=\"features-and-benefits-list\"><ul class=\"features-and-benefits-list-list\"><li class=\"features-and-benefits-list-item\">Automotive grade AEC-Q200 qualified</li><li class=\"features-and-benefits-list-item\">EIA 0402, 0603, 0805, 1206, 1210, 1218, 2010, 2512 standard case sizes available</li><li class=\"features-and-benefits-list-item\">Stability &Delta", Tipo de Elemento Resistivo="Película Gruesa", Tipo de Resistencia="0402 [Métrica 1005]", Tolerancia de Resistencia="± 1%", ComponentLink1Description=http://www.farnell.com/datasheets/2111203.pdf, ComponentLink1URL=http://www.farnell.com/datasheets/2111203.pdf, ComponentLink2Description=http://www.farnell.com/cad/1551424.zip, ComponentLink2URL=http://www.farnell.com/cad/1551424.zip, Encapsulado="Cinta Cortada", Estándar de Certificación para Automoción=AEC-Q200, Nivel de Sensibilidad a la Humedad (MSL)="MSL 1 - Ilimitado", Núm. de Contactos Macho=2, Potencia Nominal=63, Pricing 1="10=0,0125, 400=0,0097, 1000=0,0069, 2500=0,0057, 5000=0,0041 (EUR)", Rango de Producto="Serie AEC-Q200 CRCW", RoHS=Y-EX, Stock 1=83181, Supplier 1=Farnell, Supplier 2=Digi-Key, Supplier Part Number 2=541-1.00KLCT-ND, Tensión Nominal=50
R16: library part RC0402FR-07220RL, "SMD Chip Resistor, 220 Ohm, ± 1%, 62.5 mW, 0402 [1005 Metric], Thick Film, General Purpose", Case Code (Imperial)=0402, Case Code (Metric)=1005, Manufacturer=Yageo, Max Operating Temperature=155°C, Max Power Dissipation=63mW, Min Operating Temperature=-55°C, Package Quantity=1, Power Rating=62.5mW, Resistance=220R, Resistance Tolerance=1%, Resistor Type="Thick Film", Supplier Part Number 1=9239154, Temperature Coefficient=100ppm/°C, Voltage Rating=50V, Case/Package=0402, Category="Chip SMD Resistors", ComponentLink1Description=http://www.farnell.com/datasheets/2167052.pdf?src-supplier=Farnell, ComponentLink1URL=http://www.farnell.com/datasheets/2167052.pdf?src-supplier=Farnell, ComponentLink2Description=http://www.farnell.com/datasheets/1018594.pdf?src-supplier=Farnell, ComponentLink2URL=http://www.farnell.com/datasheets/1018594.pdf?src-supplier=Farnell, ComponentLink3Description=http://www.farnell.com/datasheets/1686128.pdf?src-supplier=Element14, ComponentLink3URL=http://www.farnell.com/datasheets/1686128.pdf?src-supplier=Element14, ComponentLink4Description=http://www.farnell.com/datasheets/2167052.pdf?src-supplier=Newark, ComponentLink4URL=http://www.farnell.com/datasheets/2167052.pdf?src-supplier=Newark, ComponentLink5Description=http://www.farnell.com/datasheets/2167052.pdf?src-supplier=Element14, ComponentLink5URL=http://www.farnell.com/datasheets/2167052.pdf?src-supplier=Element14, ComponentLink6Description=https://datasheet.octopart.com/RC0402FR-07220RL-Yageo-datasheet-10408619.pdf?src-supplier=Element14, ComponentLink6URL=https://datasheet.octopart.com/RC0402FR-07220RL-Yageo-datasheet-10408619.pdf?src-supplier=Element14, Construction=Rectangular, Depth=0.5mm, Features="Moisture Resistant", Height=0.016inch, Lead Free=5697LeadFree, Length=0.039inch, Manufacturer Part Number=RC0402FR-07220RL, Military Standard=Not, Number of Pins=2, Number of Terminations=2, Packaging="Tape and Reel", Pricing 1="10=0,0099, 100=0,0055, 500=0,0044, 2500=0,0032, 5000=0,0031 (EUR)", Reach SVHC Compliant=No, RoHS=Yes, RoHS Compliant=Yes, Series=RC, Size Code=0402, Stock 1=412549, Supplier 1=Farnell, Technology="THICK FILM", Termination=SMD/SMT, Tolerance=1%, Voltage Rating (AC)=50V, Voltage Rating (DC)=50V, Width=0.02inch
TP1 TP2 TP3 TP4 TP5 TP6 TP7 TP8 TP9 TP10 TP11 TP12 TP13 TP14 TP15 TP16 TP17 TP18: library part "Test Point"
U2: "RP2040 chip for Raspberry Pi Pico - ARM Cortex-M0+ MCU 32-Bit", Package=None, Availability="In Stock", Check_prices=https://www.snapeda.com/parts/RP2040/Raspberry+Pi/view-part/?ref=eda, MF="Raspberry Pi", MP=RP2040, Price=None, Purchase-URL=https://pricing.snapeda.com/search/part/RP2040/?ref=eda, SnapEDA_Link=https://www.snapeda.com/parts/RP2040/Raspberry+Pi/view-part/?ref=snap
U3: "NOR Flash Serial (SPI, Dual SPI, Quad SPI) 3V/3.3V 16M-bit 2M x 8 6ns 8-Pin USON EP T/R", Package="UFDFN-8 Winbond", Availability="In Stock", Check_prices=https://www.snapeda.com/parts/W25Q16JVUXIQ/Winbond/view-part/?ref=eda, MF=Winbond, MP=W25Q16JVUXIQ, Price=None, Purchase-URL=https://pricing.snapeda.com/search/part/W25Q16JVUXIQ/?ref=eda, SnapEDA_Link=https://www.snapeda.com/parts/W25Q16JVUXIQ/Winbond/view-part/?ref=snap
U4: "Integrated Circuit", Manufacturer_Name=MK, Datasheet Link=https://datasheet.lcsc.com/lcsc/2110081830_MK-MKDV1GCL-AB_C2686055.pdf, Height=0.8mm, Manufacturer_Part_Number=MKDV1GCL-AB
J3: DeviceName=A, DeviceSetName=NDS_CARD, GateName_1=NDS_CARD, LibraryName=nds, SymbolName_1=NDS_CONNECTOR

## Free pads (board coordinates)
  round 0 hole 2.4 unplated: 4(4.83,26.25) 4(21.3,26.25)

## Via types
v1: diameter 0.46, hole 0.2, L1 to L4, tented both sides, 103 vias
v2: diameter 0.65, hole 0.25, L1 to L4, tented both sides, 39 vias

## Nets (pads, with @x,y where several pads share a name; then routed paths per layer and width w, separated by ;. In a path a pad name is that pad's centre, name@x,y a point inside that pad or via, vN(x,y) a via of type N, cw(c..) or ccw(c..) an arc to the next point about the centre after c; other vN are vias at no path point)
+1V1: C9.2 C10.2 C11.2 U2.23 U2.45 U2.50 | length 7.6
  L1 w0.2: C11.2@19.85,22.01 20.1,21.76 U2.50 20.1,20.26 20.026,20.186 19.94,20.1 v1(19.9,20.1) ; v1(20.6,14.86) 20.9,14.56 20.9,13.56 21.3,13.16 C10.2@21.3,12.76 ; v1(21.8,20.1) 22.1,20.4 22.1,21.319 22.466,21.685 23.025,21.685 C9.2
+3V3: C3.2 C4.2 C5.2 C6.2 C7.2 C8.2 C14.2 C15.2 J3.8 R3.2 R4.2 R5.2 R6.2 R7.2 R8.2 R9.2 R15.1 TP9.1 TP10.1 U2.1 U2.10 U2.22 U2.33 U2.42 U2.43 U2.44 U2.48 U2.49 U3.8 U4.8 | length 55.6
  L1 w0.2: R6.2@1.155,13.655 R6.2 R5.2 2.4,13.7 2.466,13.634 v1(3.133,13.634) ; v1(14.1,14.06) R7.2 ; v2(15.186,18.446) 15.186,18.474 15.1,18.56 C3.2 ; C5.2 U2.10 ; C4.2 15.404,20.064 16.861,20.064 U2.1 ; U3.8 C15.2 ; C14.2 C15.2 ; v2(18.8,24.1) 18.77,24.13 17.93,24.13 C15.2 ; C6.2@20.1,12.76 20.433,13.093 20.433,13.493 20.5,13.56 U2.22 ; C6.2 v2(20.6,12.76) ; U2.49 20.5,20.282 20.7,20.082 20.9,20.282 U2.48 U2.48@20.9,21.215 ; U2.44 22.5,20.282 22.7,20.082 22.9,20.282 U2.43 ; v2(22.55,11.26) 22.55,11.71 R3.2 ; U2.33 25.05,16.46 25.1,16.51 C7.2@25.1,16.57 ; U2.42 C8.2 25.05,19.91 25.235,19.91 25.285,19.86 v1(25.355,19.86) ; C7.2 25.23,16.49 25.67,16.49 v1(25.674,16.494) ; R15.1 v1(26.1,14.1)
  L1 w0.3: R9.2@3.8,14.6 v1(3.8,15.2) ; R4.2@6.1,14.6 6.141,14.641 6.141,15.324 v1(6.172,15.355) ; v1(11.9,14.1) R8.2 ; C5.2 15.317,16.543 15.317,16.911 15.367,16.96 v2(15.441,16.96)
  L1 w0.4: C3.2 C4.2
  L1 w0.6: J3.8 11.163,3.163 11.163,5.802 v2(11.167,5.806)
  L1 w0.7: U4.8 10.5,22.6 v2(10.9,23)
  L3-PW w0.2: v2(20.6,12.76) 21.348,12.76 21.663,12.445 23.345,12.445 25,14.1 v1(26.1,14.1)
  L3-PW w0.6: v2(11.167,5.806) 11.167,10.307 12.81,11.95
  L4 w0.2: TP10.1 0.6,20.5 0.6,14.4 1.366,13.634 v1(3.133,13.634) ; v2@18.8,23.978 v2(18.8,24.1)
  L4 w0.3: v2(8.275,26.125) 9.466,27.316 9.466,27.666 TP9.1
  L4 w0.7: v2(10.9,23) 10.9,23.4
  other v2: 20.7,19.96 22.7,19.96
CLK_DS: J3.2 U2.14 | length 22.7
  L1 w0.2: J3.2 2.159,5.802 3.457,7.1 12.04,7.1 14.7,9.76 14.7,12.86 16.545,14.705 16.545,14.86 U2.14
CLK_SD: R9.1 TP6.1 U2.5 U4.3 | length 20.1
  L1 w0.2: v1(15.9,18.26) 15.97,18.26 16.17,18.46 U2.5
  L1 w0.3: U4.3 4.435,18.265 v1(5.3,17.4) v1(5.3,14.9) 5.15,14.75 4.9,14.75 4.8,14.65 R9.1@4.8,14.6
  L4 w0.2: v1(5.3,14.9) 5.579,14.621 6.621,14.621 9.86,17.86 15.5,17.86 v1(15.9,18.26)
  L4 w0.3: TP6.1 4.973,17.427 5.273,17.427 v1(5.3,17.4)
CMD: R4.1 TP1.1 U2.6 U4.5 | length 21
  L1 w0.2: U2.6 17.76,18.06 v1(17.9,18.2)
  L1 w0.3: v1@7.7,18.2 7.7,17.89 8.595,16.995 ; v1(7.8,14.6) 7.1,14.6 7.1,15.5 8.595,16.995 ; U4.5 8.595,16.995
  L4 w0.2: v1(7.8,14.6) 9.6,16.4 13.027,16.4 14.137,17.51 15.864,17.51 16.554,18.2 v1(17.9,18.2)
  L4 w0.3: TP1.1 6.834,18.134 7.491,18.134 7.657,18.3 v1(7.7,18.3)
D0: J3.9 U2.15 | length 13.6
  L1 w0.2: v1(17.349,14.309) 17.385,14.345 17.7,14.345 U2.15
  L1 w0.3: J3.9@12.632,3.459 12.8,3.627 12.667,3.76 12.667,5.806 12.706,5.806 v2@12.8,5.9
  L4 w0.2: v2@12.8,5.9 12.8,9.76 v1(17.349,14.309)
  other v2: 12.663,5.806
D1: J3.10 U2.16 | length 14.2
  L1 w0.2: v1(17.732,14.876) 17.732,14.817 18.1,14.449 U2.16
  L1 w0.3: J3.10@14.154,3.459 14.3,3.605 14.205,3.7 14.205,5.8 14.205,5.805 v2@14.3,5.9
  L4 w0.2: v2@14.205,5.8 14.205,10.165 17.804,13.764 17.804,14.803 v1(17.732,14.876)
  other v2: 14.159,5.806
D2: J3.11 U2.17 | length 14.1
  L1 w0.2: v1(18.37,14.822) 18.5,14.692 U2.17
  L1 w0.3: J3.11@15.808,3.459 15.8,3.467 15.818,3.485 15.696,3.607 15.696,5.783 15.786,5.783 v2@15.818,5.815
  L4 w0.2: v2@15.696,5.783 19.1,9.187 19.1,14.092 v1(18.37,14.822)
  other v2: 15.656,5.806
D3: J3.12 U2.18 | length 13.7
  L1 w0.2: U2.18 18.9,14.694 18.985,14.78 v1(18.985,14.85)
  L1 w0.3: v2@17.152,5.783 17.152,3.86 17.3,3.712 17.123,3.534 J3.12@17.198,3.459
  L4 w0.2: v2@17.152,5.783 19.6,8.231 19.6,14.16 18.985,14.774 v1(18.985,14.85)
  other v2: 17.152,5.806
D4: J3.13 U2.27 | length 13
  L1 w0.2: J3.13 18.659,5.819 23.2,10.36 23.2,13.06 23.025,13.235 22.617,13.235 22.5,13.352 U2.27
D5: J3.14 U2.28 | length 12.6
  L1 w0.2: J3.14 20.159,6.073 23.744,9.657 23.744,13.473 23.191,14.025 U2.28
D6: J3.15 U2.29 | length 12.9
  L1 w0.2: J3.15 21.659,6.228 24.3,8.869 24.3,14.66 24.1,14.86 U2.29
D7: J3.16 U2.30 | length 13.4
  L1 w0.2: J3.16 23.159,6.359 24.825,8.025 24.825,14.935 24.5,15.26 U2.30
D_N: R10.1 TP8.1 | length 12.1
  L1 w0.26: v1(13.714,26.723) 14.613,26.723 14.613,26.373 15.381,26.373 15.381,26.723 17.827,26.723 18.277,26.723 19.35,25.65 19.35,25.35 20.3,24.4 21.01,24.4 22.25,23.16 R10.1
  L4 w0.26: TP8.1 13.6,26.891 13.714,26.777 v1(13.714,26.723)
D_P: R11.1 TP7.1 | length 12.2
  L1 w0.26: v1@11.8,26.745 v1(11.8,26.7) 12.6,25.9 18.3,25.9 18.85,25.35 18.85,25.05 20,23.9 20.31,23.9 21.05,23.16 R11.1
  L4 w0.26: TP7.1 11.6,26.945 11.8,26.745 v1(11.8,26.7)
DAT0: R8.1 TP5.1 U2.7 U4.6 | length 19.5
  L1 w0.2: U2.7 17.77,17.66 17.852,17.577 v1@17.922,17.577
  L1 w0.3: v1@7.9,19.4 7.9,19.3 8.935,18.265 U4.6 11.435,18.265 12.1,17.6 12.1,16.6 10.9,15.4 R8.1
  L4 w0.2: v1(10.804,15.192) 11.35,14.645 14.945,14.645 v1(17.9,17.6)
  L4 w0.3: TP5.1 6.805,20 7.424,19.381 7.869,19.381 v1(7.9,19.35)
DAT1: R7.1 TP4.1 U2.8 U4.7 | length 17
  L1 w0.2: v1(16.258,17.26) U2.8
  L1 w0.3: v1(7.5,21) 8.965,19.535 U4.7 10.535,19.5 12,19.5 13,18.5 13,15.343 12.8,15.143 v1(12.8,15.1) 12.831,15.069 12.831,15.019 13.1,14.75 R7.1
  L4 w0.2: v1(12.8,15.1) 14,16.3 15.64,16.3 16.254,16.914 16.254,17.256 v1(16.258,17.26)
  L4 w0.3: TP4.1 6.7,21.843 7.5,21.043 v1(7.5,21)
DAT2: R6.1 TP3.1 U2.9 U4.1 | length 33.9
  L1 w0.2: U2.9 17.836,16.86 v1(17.901,16.795)
  L1 w0.3: v1(1.48,14.622) 1.48,14.659 1.469,14.669 1.169,14.669 R6.1 1.05,14.6 0.95,14.7 0.95,14.75 0.8,14.9 0.8,20.3 1.305,20.805 4.662,20.805 4.957,21.1 v1(5,21.1)
  L4 w0.2: v1(1.48,14.622) 1.53,14.672 1.53,14.83 3.6,16.9 7.6,16.9 9.696,18.996 15.414,18.996 15.664,18.745 17.998,18.745 18.355,18.388 18.355,17.249 v1(17.901,16.795)
  L4 w0.3: TP3.1 4.4,21.811 4.969,21.241 4.969,21.131 v1(5,21.1)
DAT3: R5.1 TP2.1 U2.11 U4.2 | length 28.2
  L1 w0.2: U2.11 v1(17.6,16.06)
  L1 w0.3: v1(3,14.6) R5.1 2.3,15 1.5,15.8 1.5,19 2.035,19.535 U4.2 5.365,19.535 v1@5.5,19.4
  L4 w0.2: v1(3,14.6) 4.6,13 11.689,13 12.189,13.5 13.645,13.5 14.64,13.5 17.2,16.06 v1(17.6,16.06)
  L4 w0.3: TP2.1 4.589,20 5.091,19.498 5.402,19.498 v1(5.432,19.467)
GND: C3.1 C4.1 C5.1 C6.1 C7.1 C8.1 C9.1 C10.1 C11.1 C12.1 C13.1 C14.1 C15.1 D1.1 D2.1 J3.1 J3.17 R16.1 TP11.1 TP18.1 U2.19 U2.57 U3.4 U3.9 U4.4 X1.2 X1.4 | length 21.7
  L1 w0.2: v2(13.8,20.06) C4.1 C4.1@14.3,19.96 ; v1@14.3,21.36 14.342,21.36 14.642,21.66 15.05,21.66 U3.4 ; C5.1 v2(14.4,16.9) ; v2(14.4,18.41) C3.1 ; U3.9 16.519,22.441 16.519,21.518 v2(16.539,21.499) ; C15.1 16.95,24.11 16.95,23.575 v2(17,23.525) ; U2.19 19.3,14.449 19.664,14.813 v2@19.664,14.879 ; v1@19.331,23.201 19.355,23.177 19.883,23.177 C11.1 ; v2@19.585,14.8 v2@19.664,14.879 ; v2(19.664,14.895) v2@19.664,14.879 ; v2(20.2,11.26) C6.1 ; v2(21.4,11.26) C10.1 ; C9.1 23.527,23.187 23.527,23.567 v1(23.555,23.595) ; C8.1 25.413,19.06 v1(25.477,18.996) ; C7.1 25.455,17.46 25.413,17.502 25.682,17.502 v1(25.722,17.462)
  L1 w0.25: C12.1 15.464,10.796 15.464,10.394 v2(16.226,9.631) ; v2@16.255,9.805 16.436,9.985 16.475,9.985 16.9,10.41 X1.2 17.325,10.885 17.325,11.085 17.975,11.735 17.975,11.935 X1.4 ; v2@16.287,9.692 16.895,9.085 16.975,9.085 C13.1
  L1 w0.6: J3.1@0.8,3.303 v2(0.8,5.8) ; D1.1 v2(6.4,23.3) ; v2(8.6,22.6) 8.62,22.62 8.62,23.282 D2.1 ; v2(24.8,5.8) 24.8,2.967 J3.17@24.808,2.959
  L4 w0.2: v2@19.582,14.977 v2(19.664,14.895)
  other v1: 1.5,6.3 25.5,6.3 1,7.3 15,7.3 16,7.3 18,7.3 4.5,8.3 5.5,8.3 15.5,8.3 16.5,8.3 25.5,8.3 5,9.3 6,9.3 7,9.3 8,9.3 9,9.3 10,9.3 4.5,10.3 5.5,10.3 6.5,10.3 5,11.3 4.5,12.3 0,13.4 14.323,21.47 13.4,21.9 25.5,22.3 19.416,23.193 23.5,26.3 1,27.3 2,27.3 19,27.3 23,27.3 24,27.3 25,27.3 1.5,28.3 2.5,28.3 16.5,28.3 17.5,28.3 18.5,28.3 19.5,28.3 20.5,28.3 21.5,28.3 22.5,28.3 23.5,28.3 24.5,28.3 25.5,28.3
  other v2: 4.3,16.2 19.3,16.46 21.3,16.46 19.3,18.46 21.3,18.46 5.8,20.6
IRQ: J3.7 R16.2 U2.31 | length 28.8
  L1 w0.2: v2(20.6,9) 20.6,9.084 21,9.484 R16.2 ; v1(22.9,15.6) 22.96,15.66 U2.31
  L1 w0.3: J3.7@9.588,3.459 9.564,3.483 9.8,3.718 9.685,3.833 v2@9.685,5.794
  L4 w0.2: v2@9.685,5.794 9.806,5.794 11.1,4.5 19.14,4.5 21.84,7.2 21.84,9 ; v2(20.6,9) 21.84,9 ; v1(22.9,15.6) 23.2,15.3 23.2,10.36 21.84,9
  other v2: 9.67,5.806
LED_B: R12.2 U2.40 | length 33.8
  L1 w0.2: R12.2 1.1,25.5 1.6,26 2.383,26 2.7,25.683 2.7,25.3 3.817,24.183 9.783,24.183 10.1,24.5 11.8,24.5 12.1,24.2 v1(13.2,24.2) ; v1(22.7,19.1) 22.77,19.1 22.93,19.26 U2.40
  L4 w0.2: v1(13.2,24.2) 13.209,24.2 14.909,25.9 18.9,25.9 20.23,24.57 21.812,24.57 22.142,24.9 23.375,24.9 24.01,24.265 24.01,22.61 23.1,21.7 23.1,20.7 23.517,20.283 23.517,19.617 23.025,19.125 22.725,19.125 v1(22.7,19.1)
LED_R: R13.2 U2.39 | length 35.8
  L1 w0.2: R13.2 1.1,22.8 1.9,22 8.9,22 10.8,23.9 11.6,23.9 12.5,23 v1(12.5,22.4) ; v1(22.7,18) 22.7,18.4 23.16,18.86 U2.39
  L4 w0.2: v1(12.5,22.4) 15.5,25.4 18.8,25.4 20.125,24.075 21.897,24.075 22.237,24.415 22.983,24.415 23.1,24.298 23.1,22.4 21.345,20.645 21.345,19.355 v1(22.7,18)
NetC12_2: C12.2 U2.20 X1.1 | length 5.5
  L1 w0.2: X1.1 16.9,12.41 17.683,13.193 19.292,13.193 19.7,13.601 U2.20
  L1 w0.25: C12.2 15.471,11.931 16.475,11.931 16.9,12.356 X1.1
NetC13_2: C13.2 U2.21 X1.3 | length 5.9
  L1 w0.2: X1.3 18.4,10.51 19.175,11.285 19.175,12.617 20.1,13.542 U2.21
  L1 w0.25: C13.2 18.1,10.16 X1.3
NetD1_2: D1.2 R12.1 | length 3.2
  L1 w0.3: R12.1@2.1,24.95 3.75,23.3 D1.2
  L1 w0.4: R12.1@2.1,24.95 R12.1
NetD2_2: D2.2 R13.1 | length 6.2
  L1 w0.3: R13.1 2.1,23.25 2.2,23.15 2.25,23.15 2.9,22.5 6.714,22.5 D2.2@7.514,23.3
  L1 w0.4: D2.2@7.514,23.3 D2.2
NetR3_1: R3.1 TP13.1 U2.26 | length 2.4
  L1 w0.2: U2.26 v1(22.1,12.9) 22.15,12.85 22.41,12.85 R3.1@22.5,12.76
  L4 w0.2: TP13.1 22.05,13.65 22.05,12.95 v1(22.1,12.9)
NetR14_1: R14.1 TP12.1 | length 2
  L1 w0.2: R14.1 24.609,25.309 24.609,26.441 v1(24.619,26.45)
  L4 w0.2: v1(24.619,26.45) 25.169,25.9 TP12.1
NetR15_2: R15.2 U2.36 | length 5.8
  L1 w0.2: U2.36 24.389,17.66 24.674,17.945 24.888,17.945 25.882,17.945 26.177,17.65 26.177,15.31 25.983,15.116 25.516,15.116 R15.2
QSPI_SCLK: U2.52 U3.6 | length 2.5
  L1 w0.2: U3.6@17.6,22.21 18.468,22.21 19.3,21.378 U2.52
QSPI_SD0: U2.53 U3.5 | length 1.6
  L1 w0.2: U3.5 17.948,21.71 17.951,21.713 18.506,21.713 18.9,21.319 U2.53
QSPI_SD1: U2.55 U3.2 | length 6.8
  L1 w0.2: v1(14.3,22.66) 14.362,22.722 14.375,22.735 15.075,22.735 U3.2 U3.2@15.125,22.685 ; v1(18.1,20.16) U2.55
  L4 w0.2: v1(14.3,22.66) 14.37,22.66 14.485,22.545 14.535,22.545 14.88,22.2 16.616,22.2 18.1,20.716 v1(18.1,20.16)
QSPI_SD2: U2.54 U3.3 | length 7.7
  L1 w0.2: v1@14.2,22.06 14.2,22.003 14.287,22.003 14.493,22.21 U3.3 ; U2.54 18.5,20.457 18.776,20.181 v1(18.776,20.104)
  L4 w0.2: v1@14.2,22.06 14.37,22.06 14.475,21.955 14.545,21.955 16.795,19.705 17.301,19.705 17.311,19.715 17.688,19.715 17.698,19.705 18.378,19.705 v1(18.776,20.104)
  other v1: 14.3,22.06
QSPI_SD3: U2.51 U3.7 | length 2.9
  L1 w0.2: U3.7 18.445,22.71 19.7,21.455 U2.51
QSPI_SS: R14.2 U2.56 U3.1 | length 17.9
  L1 w0.2: v1@14.2,23.26 15.05,23.26 U3.1 ; U3.1@15.128,23.16 15.568,23.16 15.92,22.808 15.92,21.262 16.422,20.76 17.7,20.76 U2.56 ; v1(22.575,23.96) 23.47,24.855 23.47,25.17 R14.2
  L4 w0.2: v1(14.34,23.245) 14.39,23.195 14.605,23.195 15.14,22.66 17,22.66 18.26,21.4 20.9,21.4 22.575,23.075 v1(22.575,23.96)
ROM_CS: J3.4 U2.13 | length 20.3
  L1 w0.2: U2.13 17.43,15.26 17.63,15.46 v1(17.7,15.46)
  L1 w0.3: J3.4@4.987,3.494 5.3,3.808 5.182,3.926 v2@5.182,5.707
  L4 w0.2: v2@5.182,5.707 5.393,5.707 5.885,5.215 6.769,5.215 8.112,6.558 8.558,6.558 17.41,15.41 17.65,15.41 v1(17.7,15.46)
  other v2: 5.182,5.806
RST_DS: J3.5 U2.12 | length 20.6
  L1 w0.2: v2(6.509,8.1) 11.948,8.1 14,10.152 14,13.2 15.523,14.723 15.523,14.983 16.2,15.66 U2.12
  L1 w0.3: v2(6.533,5.806) 6.533,3.585 J3.5@6.6,3.518 ; J3.5 6.659,3.92 J3.5@6.662,3.923
  L4 w0.2: v2(6.509,8.1) 6.589,8.02 6.589,6.016 6.662,5.943 v2@6.662,5.765
SPI_CS: J3.6 U2.32 | length 29.3
  L1 w0.2: U2.32 24.23,16.06 24.43,15.86 v1(24.5,15.86)
  L1 w0.3: J3.6@8.1,3.493 8.174,3.567 v2(8.174,5.806)
  L4 w0.2: v2@8.3,5.9 10.3,3.9 19.6,3.9 24.3,8.6 24.3,15.613 24.5,15.813 v1(24.5,15.86)
SWCLK: TP15.1 U2.24 | length 8
  L1 w0.2: U2.24 v1(21.3,14.86) v1@21.3,14.96
  L4 w0.2: v1(21.3,14.86) 21.3,15.6 23,17.3 23.3,17.3 23.8,17.8 23.8,18.475 23.8,18.7 24.5,19.4 TP15.1
SWD: TP14.1 U2.25 | length 5.2
  L1 w0.2: U2.25 21.7,14.59 21.9,14.79 v1(21.9,14.86)
  L4 w0.2: v1(21.9,14.86) 21.95,14.91 21.95,15.55 23,16.6 23.7,16.6 TP14.1
UART_RX: TP17.1 U2.3 | length 14.3
  L1 w0.2: U2.3 17.67,19.26 17.73,19.2 v1@17.8,19.2
  L4 w0.2: TP17.1 7.8,22 9.19,20.61 14.35,20.61 15.806,19.154 17.754,19.154 v1@17.8,19.2
  other v1: 17.9,19.2
UART_TX: TP16.1 U2.2 | length 9.9
  L1 w0.2: v1@15.999,19.559 16.069,19.559 v1(16.12,19.609) 16.17,19.66 U2.2
  L4 w0.2: TP16.1 9.6,23.1 11.685,21.015 14.61,21.015 15.893,19.732 15.927,19.732 16.049,19.609 v1(16.12,19.609)
USB_D_N: R10.2 U2.46 | length 1.5
  L1 w0.26: U2.46 21.694,20.901 21.694,21.554 22.13,21.99 22.13,22.04 22.25,22.16 R10.2
USB_D_P: R11.2 U2.47 | length 1.4
  L1 w0.26: R11.2 21.15,22.16 21.27,22.04 21.27,21.924 21.306,21.888 21.306,20.901 U2.47
pads on no net: J3.3 U2.4 U2.34 U2.35 U2.37 U2.38 U2.41

## Polygon pours and split planes (outlines as drawn)
GND on L3-PW "NONET_L-01_P-001" (solid, remove dead copper, pour order 14): -2.825,37.039 29.875,37.039 29.875,-3.461 -2.825,-3.461
+3V3 on L3-PW "NONET_L-01_P-001" (solid, pour order 8): 15.8,22.76 12.74,22.76 11.879,23.621 10.3,23.621 2.606,15.927 2.606,12.994 3.9,11.7 3.9,8.2 3.46,7.76 2,7.76 -0.181,9.941 -0.181,24.319 4.883,29.383 12.517,29.383 13.354,28.546 13.354,26.853 15.008,25.2 15.8,25.2
+3V3 on L3-PW "NONET_L-01_P-001" (solid, remove dead copper, pour order 9): 12.2,23.814 13.515,22.5 17.4,22.5 17.4,25.2 25.226,25.208 25.234,25.2 25.234,23.034 23.226,21.011 21.11,20.979 21.105,20.622 25.949,20.622 25.949,13.969 23.744,11.895 23.744,10.8 22.285,10.8 21.181,11.904 16.172,11.904 15.485,12.6 13.605,12.6 13.605,10 8,10 4.4,13.6 3.94,13.6 3.562,13.222 2.6,13.222 2.6,16.405 10.4,23.814
+1V1 on L3-PW "NONET_L-01_P-001" (solid, pour order 3): 19.465,20.53 20.282,20.53 20.282,19.881 21.272,19.666 21.279,20.622 22.3,20.622 22.3,15.9 21,14.6 20.4,14.6 19.9,15.1 19.866,19.169 19.465,19.571
GND on L4 "NONET_L-01_P-001" (solid, remove dead copper, pour order 13): -2.918,35.482 29.782,35.482 29.782,-5.018 -2.918,-5.018
GND on L1 "NONET_L-01_P-001" (solid, remove dead copper, pour order 12): -2.8,37 29.9,37 29.9,-3.5 -2.8,-3.5
GND on L2-GND (split plane): 166 vertices, not listed, extent 0.009,0.009 26.204,29.09

## Other copper
L1:
  pour cut-out: 15.71,24.509 16.524,24.509 16.6,24.433 16.6,23.9 15.946,23.9 15.7,24.146